# EAGLE board DSLR_controller (EAGLE 7.0.0)
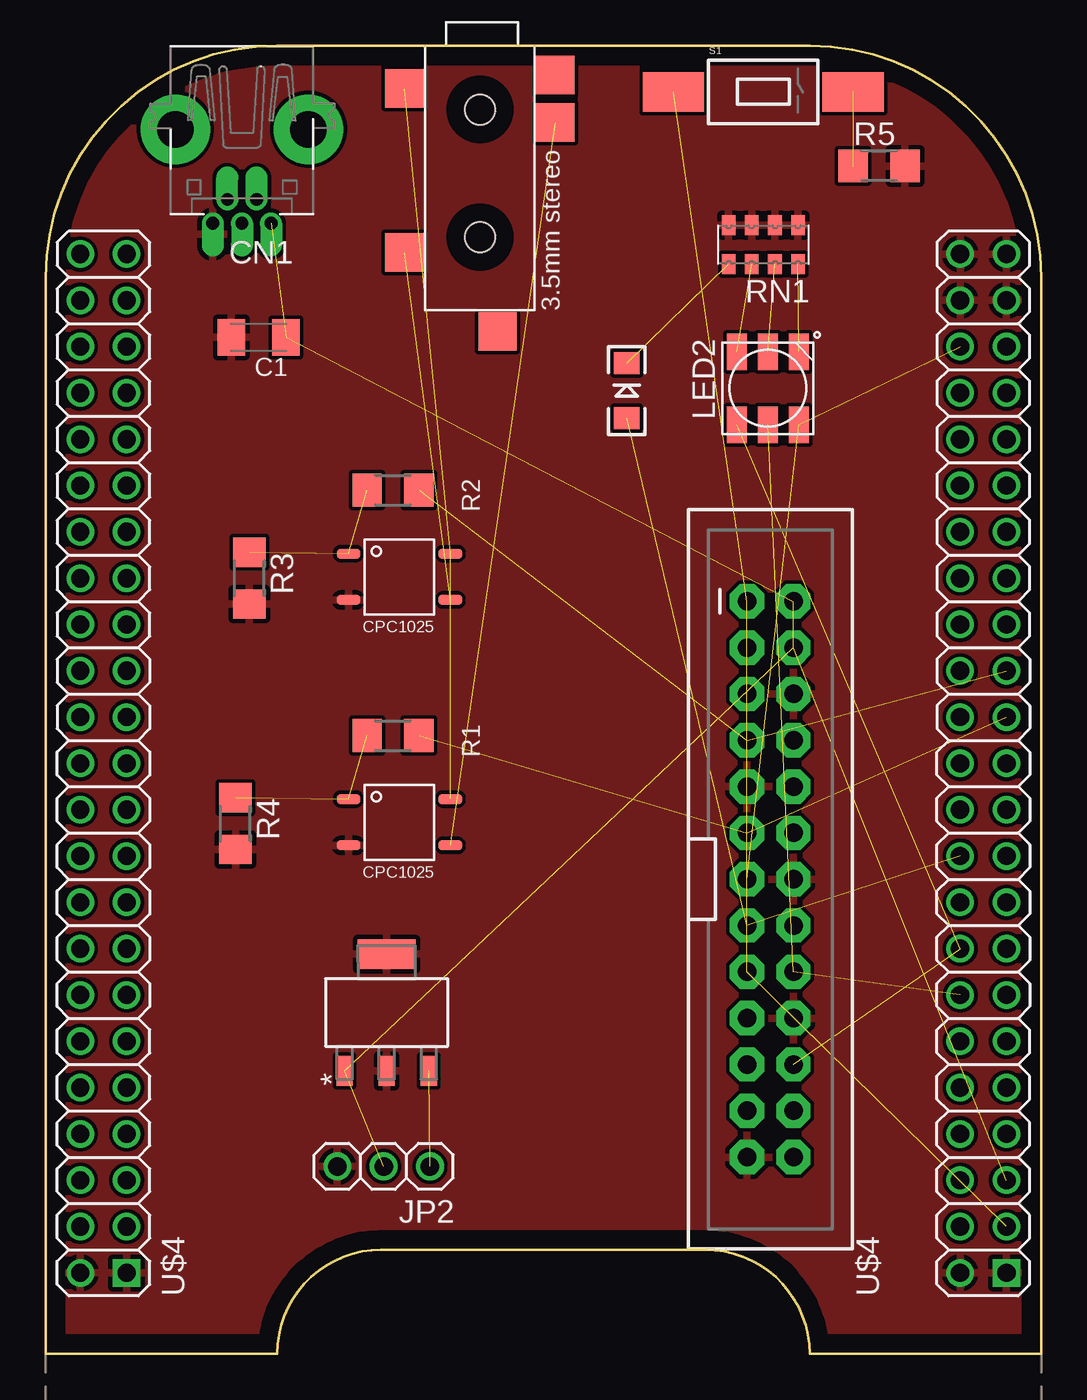
[diagram p0: board, top side]
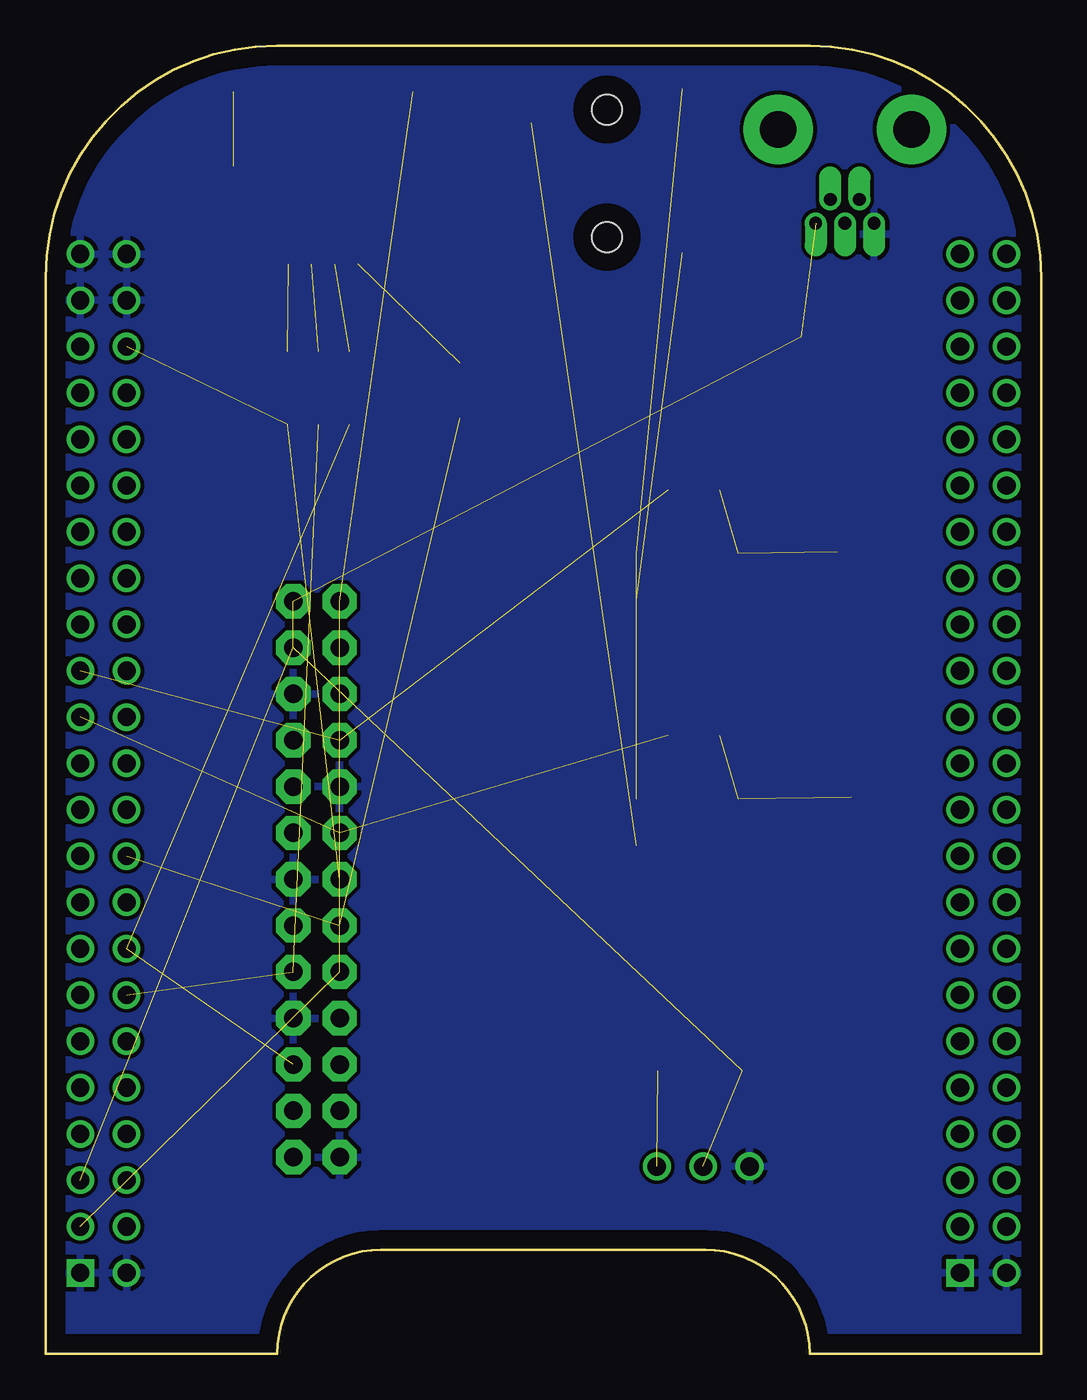
[diagram p1: board, bottom side, seen from below]

Size 54.61 x 71.75 mm. Coordinates in mm from the lower left corner, seen from the top.
Copper layers (1*16): Top 0.035mm / dielectric 1.5mm / Bottom 0.035mm
Design rules "default": minimum track width 10mil, minimum drill 24mil, track to track 8mil, track to pad 8mil, pad to pad 8mil, via to via 8mil, smd to smd 8mil, copper to edge 40mil, drill to drill 8mil, minimum pad ring 10mil, minimum via ring 8mil, stop-mask expansion 4mil, vias tented up to drill 0mil, thermal gap 10mil
Net classes: 1 VCC: width 0.381 mm
Holes 2.54 mm at 108.25,40.53 109.18,33.24

## Footprints (pad centres in the part's own frame; a part is rotated, then mirrored left to right if it is on the bottom)
C1206K = smd 1.5 x 2: 1 -1.5,0; 2 1.5,0
USB-MINIB-THM-MOLEX = drill 0.7 offset: D+ 0,9.72; D- -0.8,8.42; GND 1.6,9.72; ID 0.8,8.42; VBUS -1.6,9.72 | drill 2 pad 3.81: GND1 -3.65,4.57; GND4 3.65,4.57
2X13-SHROUDED = drill 1.016 pad 1.88 octagon: 1 -1.27,15.24; 2 1.27,15.24; 3 -1.27,12.7; 4 1.27,12.7; 5 -1.27,10.16; 6 1.27,10.16; 7 -1.27,7.62; 8 1.27,7.62; 9 -1.27,5.08; 10 1.27,5.08; 11 -1.27,2.54; 12 1.27,2.54; 13 -1.27,0; 14 1.27,0; 15 -1.27,-2.54; 16 1.27,-2.54; 17 -1.27,-5.08; 18 1.27,-5.08; 19 -1.27,-7.62; 20 1.27,-7.62; 21 -1.27,-10.16; 22 1.27,-10.16; 23 -1.27,-12.7; 24 1.27,-12.7; 25 -1.27,-15.24; 26 1.27,-15.24
1X03 = drill 1.016: 1 -2.54,0; 2 0,0; 3 2.54,0
LED-1206 = smd 1.2 x 1.4: A -1.5,0; C 1.5,0
RGBLED5050 = smd 2 x 1.1: 1 -2,1.7; 2 -2,0; 3 -2,-1.7; 4 2,-1.7; 5 2,0; 6 2,1.7
R1206 = smd 1.6 x 1.803: 1 -1.422,0; 2 1.422,0
EXBS8V = smd 0.75 x 1.1: 1 -1.905,-1.07; 2 -0.635,-1.07; 3 0.635,-1.07; 4 1.905,-1.07; 5 1.905,1.07; 6 0.635,1.07; 7 -0.635,1.07; 8 -1.905,1.07
TL3302_GULL_WING = smd 3.35 x 2.16: 1 -4.925,0; 2 4.925,0
SOT230P700X180-4N = smd 1.626 x 0.889: 1 -3.2,2.311; 2 -3.2,0; 3 -3.2,-2.311 | smd 1.626 x 3.175: 4 3.2,0
4-JACK-SMD = smd 2.108 x 2.108: 1 2.362,-1.143; 2 4.216,7.137; 3 11.354,-1.143; 4 1.6,7.137; 5 15.672,3.962 | hole 1.651: 3.505,2.997; 10.516,2.997
4-OPTORELAY = smd 1.3 x 0.559: 1 -0.66,3.378; 2 -0.66,0.838; 3 4.928,0.838; 4 4.928,3.378
BEAGLEBONE_SHIELD = drill 1 square: 1 4.445,19.05; 47 52.705,19.05 | drill 1: 2 1.905,19.05; 3 4.445,21.59; 4 1.905,21.59; 5 4.445,24.13; 6 1.905,24.13; 7 4.445,26.67; 8 1.905,26.67; 9 4.445,29.21; 10 1.905,29.21; 11 4.445,31.75; 12 1.905,31.75; 13 4.445,34.29; 14 1.905,34.29; 15 4.445,36.83; 16 1.905,36.83; 17 4.445,39.37; 18 1.905,39.37; 19 4.445,41.91; 20 1.905,41.91; 21 4.445,44.45; 22 1.905,44.45; 23 4.445,46.99; 24 1.905,46.99; 25 4.445,49.53; 26 1.905,49.53; 27 4.445,52.07; 28 1.905,52.07; 29 4.445,54.61; 30 1.905,54.61; 31 4.445,57.15; 32 1.905,57.15; 33 4.445,59.69; 34 1.905,59.69; 35 4.445,62.23; 36 1.905,62.23; 37 4.445,64.77; 38 1.905,64.77; 39 4.445,67.31; 40 1.905,67.31; 41 4.445,69.85; 42 1.905,69.85; 43 4.445,72.39; 44 1.905,72.39; 45 4.445,74.93; 46 1.905,74.93; 48 50.165,19.05; 49 52.705,21.59; 50 50.165,21.59; 51 52.705,24.13; 52 50.165,24.13; 53 52.705,26.67; 54 50.165,26.67; 55 52.705,29.21; 56 50.165,29.21; 57 52.705,31.75; 58 50.165,31.75; 59 52.705,34.29; 60 50.165,34.29; 61 52.705,36.83; 62 50.165,36.83; 63 52.705,39.37; 64 50.165,39.37; 65 52.705,41.91; 66 50.165,41.91; 67 52.705,44.45; 68 50.165,44.45; 69 52.705,46.99; 70 50.165,46.99; 71 52.705,49.53; 72 50.165,49.53; 73 52.705,52.07; 74 50.165,52.07; 75 52.705,54.61; 76 50.165,54.61; 77 52.705,57.15; 78 50.165,57.15; 79 52.705,59.69; 80 50.165,59.69; 81 52.705,62.23; 82 50.165,62.23; 83 52.705,64.77; 84 50.165,64.77; 85 52.705,67.31; 86 50.165,67.31; 87 52.705,69.85; 88 50.165,69.85; 89 52.705,72.39; 90 50.165,72.39; 91 52.705,74.93; 92 50.165,74.93

## Placement (x,y rotation side)
C1  10uF  [C1206K]  11.68,55.75 180 top
CN1  [USB-MINIB-THM-MOLEX]  10.77,71.73 180 top
JP1  RASPBERRYPI-GPIOPTH  [2X13-SHROUDED]  39.75,26.04 0 top
JP2  [1X03]  18.54,10.29 180 top
LED1  [LED-1206]  31.88,52.83 90 top
LED2  RGBLED5050  [RGBLED5050]  39.62,52.96 90 top
R1  105  [R1206]  19.05,33.91 180 top
R2  105  [R1206]  19.05,47.37 180 top
R3  60  [R1206]  11.18,42.55 270 top
R4  60  [R1206]  10.41,29.08 270 top
R5  10k  [R1206]  45.72,65.15 0 top
RN1  [EXBS8V]  39.37,60.83 180 top
S1  [TL3302_GULL_WING]  39.37,69.22 0 top
U1  MCP1703-3302E/DB  [SOT230P700X180-4N]  18.71,18.72 90 top
U$1  SWTCHCRFT_3.5JACK5-JACK-SMD  [4-JACK-SMD]  20.83,71.75 270 top
U$2  CPC1025_OPTORELAY  [4-OPTORELAY]  17.27,27.05 0 top
U$3  CPC1025_OPTORELAY  [4-OPTORELAY]  17.27,40.51 0 top
U$4  BEAGLEBONE_OUTLINE  [BEAGLEBONE_SHIELD]  0,-14.61 0 top

## Library data of the parts
C1 CN1 JP2 LED2 R1-R5 U$4 = adafruit
JP1 = SparkFun-Boards; DIST: sparkfun; DIST_ID: PRT-11490
LED1 = SparkFun-LED
RN1 = resistor-dil; OC_FARNELL: unknown; OC_NEWARK: unknown
S1 = eswitch-tact
U1 = Microchip_By_element14_Batch_1; MPN: MCP1703-3302E/DB; OC_FARNELL: 1627177; OC_NEWARK: 40M0623; PACKAGE: SOT-223-3; SUPPLIER: Microchip
U$1-U$3 = jmsaavedra

## Nets
3V3: JP1.1 JP1.17 S1.1 U$4.49
5VRAW: C1.1 CN1.VBUS JP1.2 JP1.4 JP2.2 U1.1 U$4.51
AIN0: U$4.85
BUTTON: R5.1 S1.2
CACTUS_3V3: JP2.1 U1.3
CAM_AF: JP1.11 R1.1 U$4.71
CAM_RING: U$1.2 U$2.3
CAM_SHUTTER: JP1.7 R2.1 U$4.73
CAM_SLEEVE: U$1.1 U$2.4 U$3.4
CAM_TIP: U$1.3 U$3.3
GND: C1.2 CN1.GND JP1.6 JP1.9 JP1.14 JP1.20 JP1.25 JP2.3 R3.2 R4.2 R5.2 RN1.1 RN1.2 RN1.3 RN1.4 U1.2 U1.4 U$2.2 U$3.2 U$4.1 U$4.2 U$4.47 U$4.48 U$4.89 U$4.90 U$4.91 U$4.92
LED_BLUE: JP1.13 LED2.3 U$4.88
LED_GRN: JP1.22 LED2.1 U$4.62
LED_IND: JP1.15 LED1.A U$4.66
LED_RED: JP1.18 LED2.2 U$4.60
N$1: LED2.6 RN1.6
N$2: LED2.5 RN1.7
N$3: LED2.4 RN1.8
N$4: LED1.C RN1.5
N$6: R1.2 R4.1 U$2.1
N$7: R2.2 R3.1 U$3.1
SYS_5V: U$4.53
VDD_3V3EXP: U$4.50
VDD_5V: U$4.52

## Tracks (layer width: path | path; a pad name or v marks a point on that pad's centre or on a via)
3V3  (3 unrouted)
5VRAW  (6 unrouted)
BUTTON  (1 unrouted)
CACTUS_3V3  (1 unrouted)
CAM_AF  (2 unrouted)
CAM_RING  (1 unrouted)
CAM_SHUTTER  (2 unrouted)
CAM_SLEEVE  (2 unrouted)
CAM_TIP  (1 unrouted)
GND
  pour Bottom: -11.43,78.61 68.07,79.38 62.74,-21.46 -10.16,-16.64
  pour Top: -23.88,84.45 78.74,82.42 80.52,-7.24 -22.1,-5.21
LED_BLUE  (2 unrouted)
LED_GRN  (2 unrouted)
LED_IND  (2 unrouted)
LED_RED  (2 unrouted)
N$1  (1 unrouted)
N$2  (1 unrouted)
N$3  (1 unrouted)
N$4  (1 unrouted)
N$6  (2 unrouted)
N$7  (2 unrouted)

## Text on the board
tPlace: autofocus | shutter | camera | DSLR Backpack | rev03 // august 2014